# Altium PCB Splitter_aile_V1_PCB.PcbDoc
Units mm, origin at the board's own origin, x right, y up, seen from the top; angles counter-clockwise.
Board outline 35.5 x 41.5 mm, 4 copper layers (Top Layer, Int1 (PWR), Int2 (GND), Bottom Layer), stack 1.439 mm thick; 3 components, 2 nets, 16 pads, 38 vias.
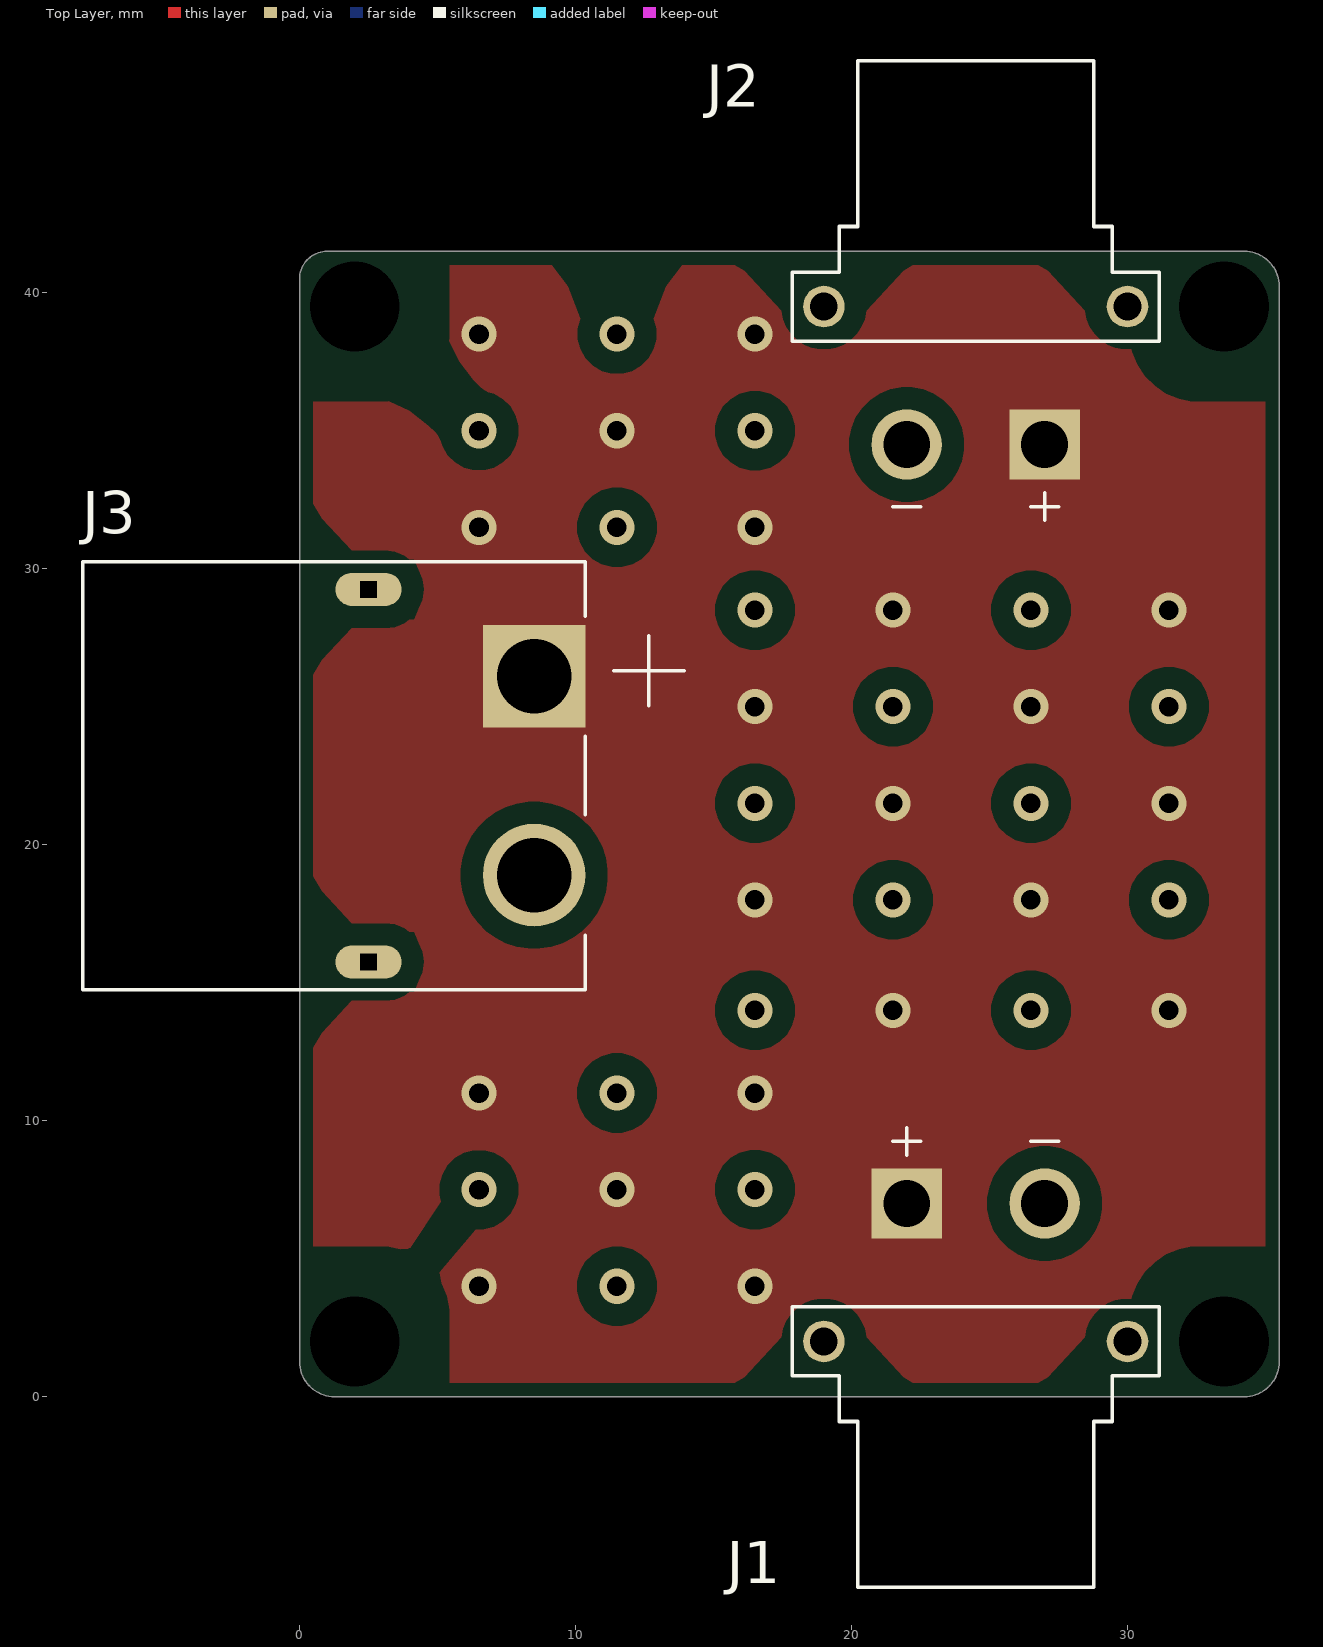
[diagram p0: Top Layer view]
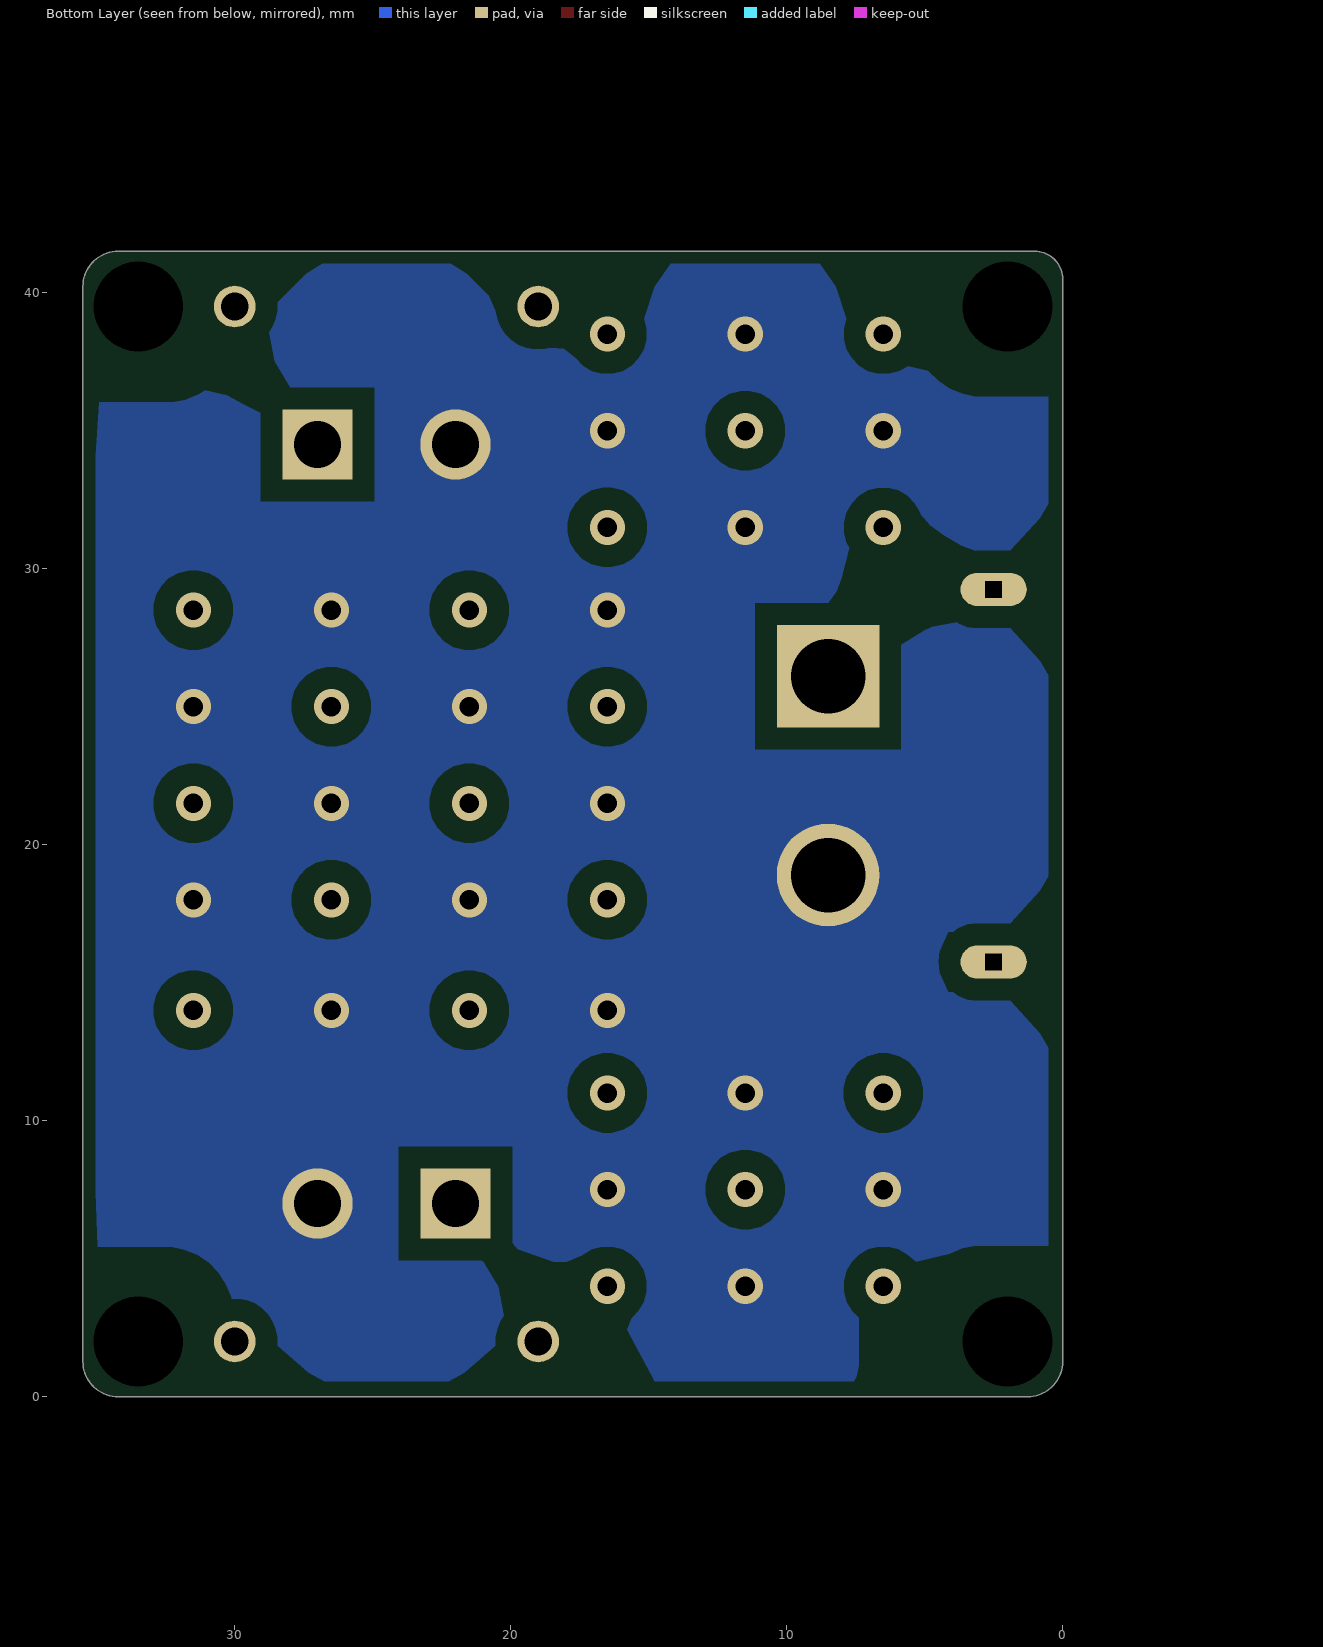
[diagram p1: Bottom Layer view, seen from below]
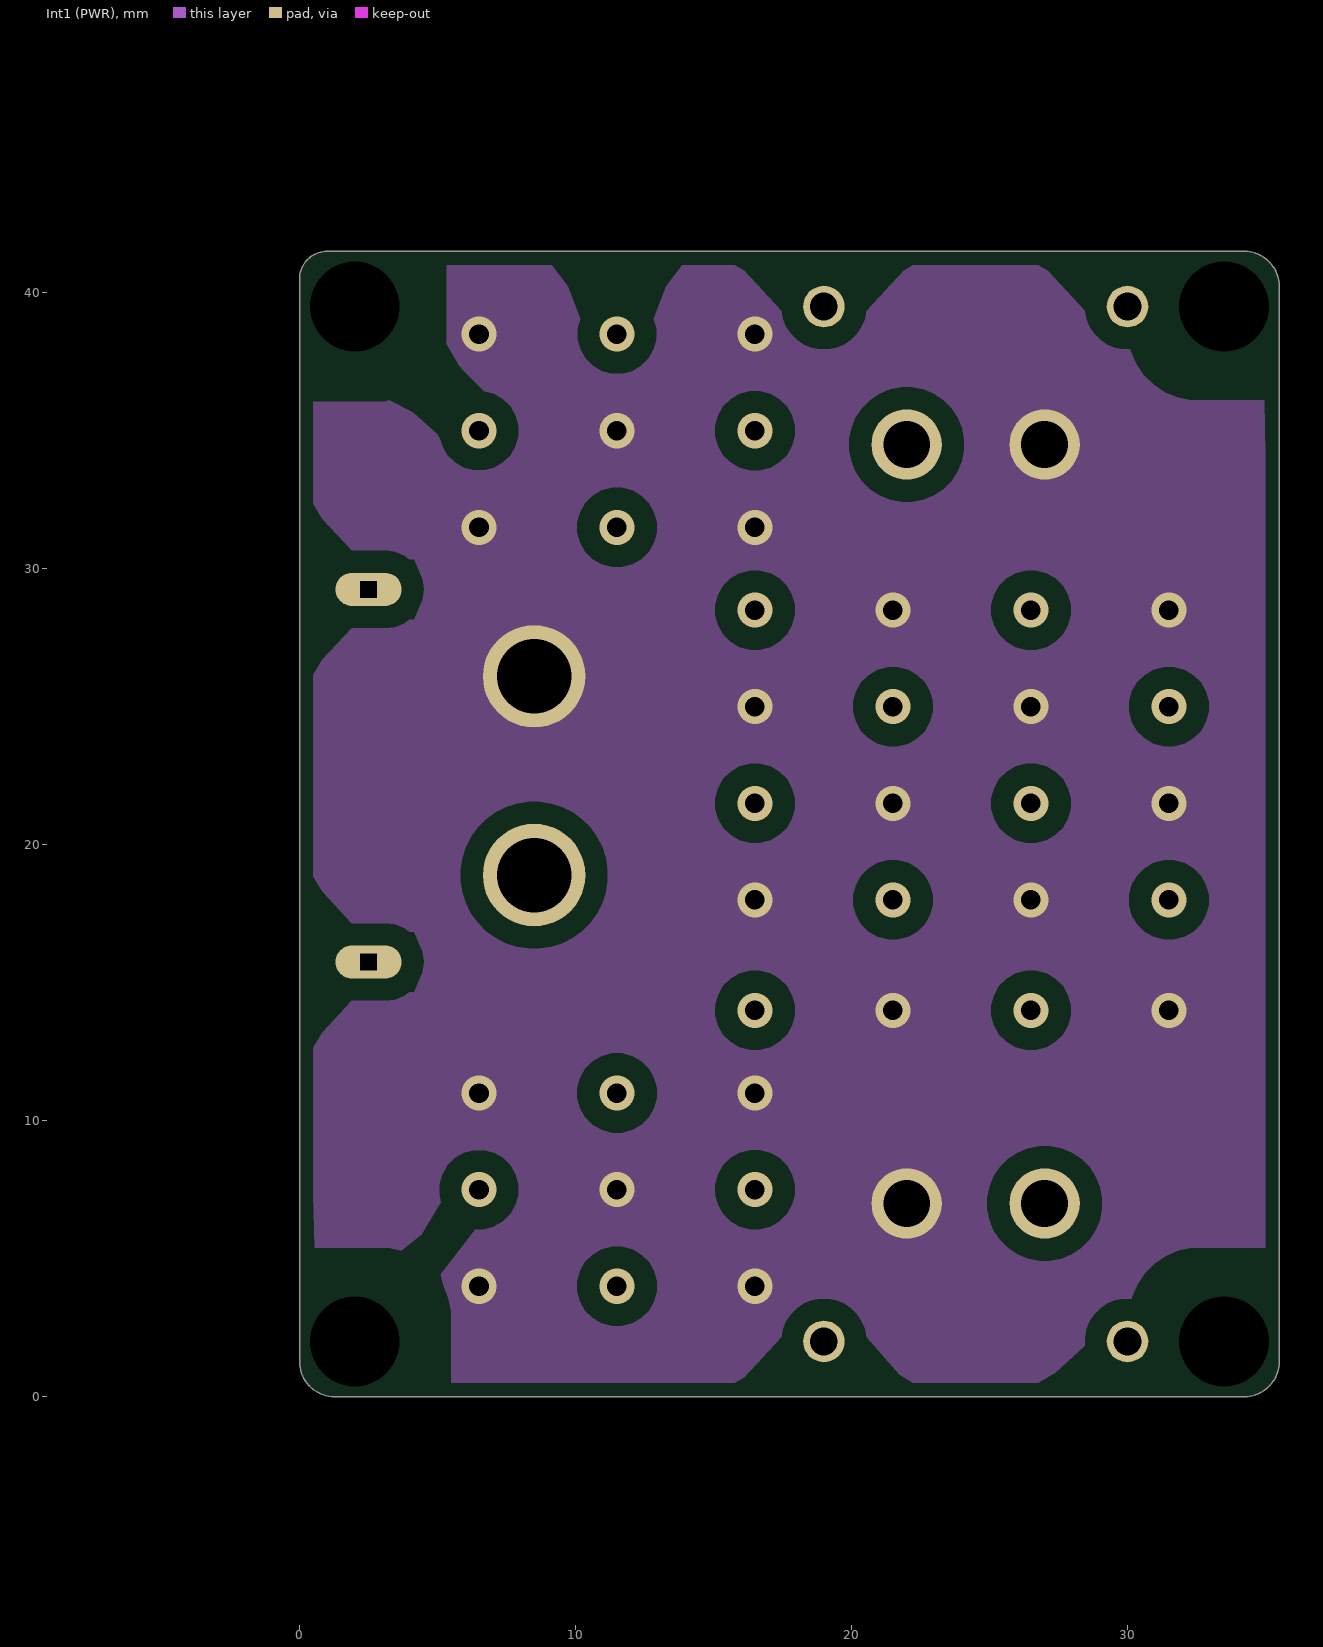
[diagram p2: Int1 (PWR)]
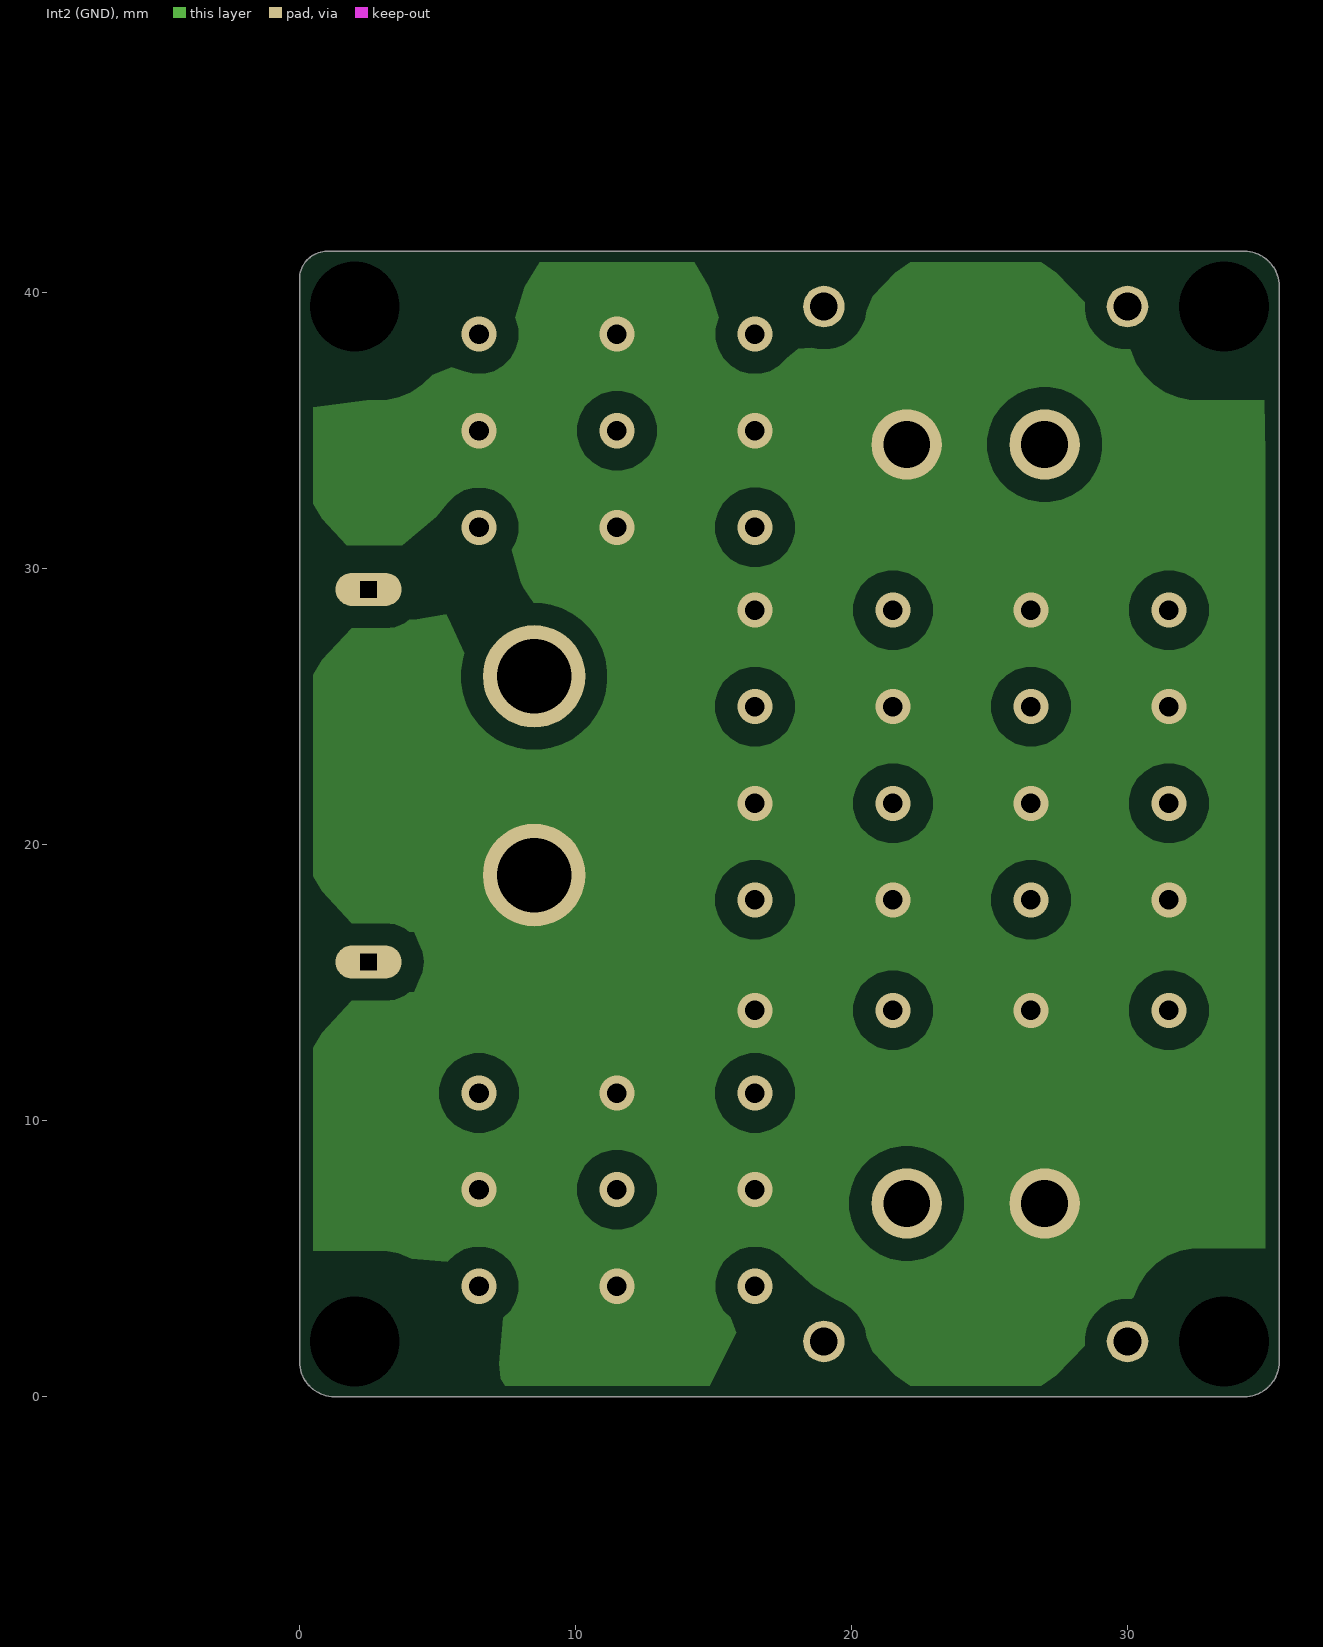
[diagram p3: Int2 (GND)]
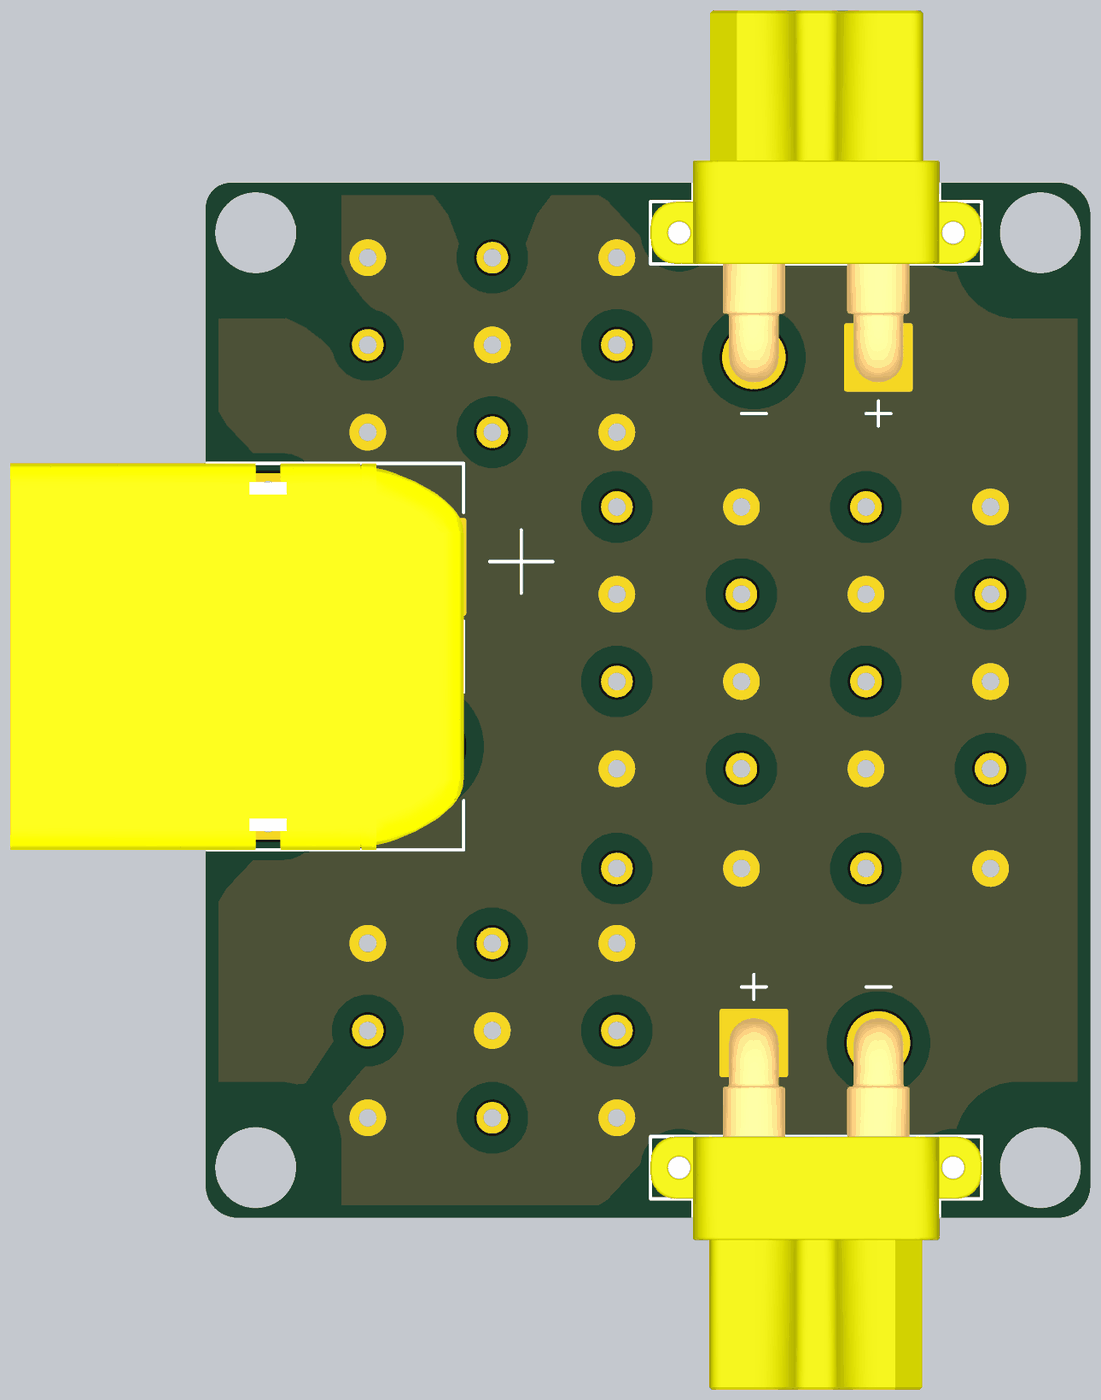
[diagram p4: 3D render of the assembled board from above, using the file's embedded part models]

## Layer stack, top to bottom
Top Solder: solder mask 0.0254, SM-001, Dk 4
Top Layer: signal copper 0.07
Dielectric 1: prepreg 0.1295, PP-017, Dk 4.3
Dielectric 2: prepreg 0.1295, PP-017, Dk 4.3
Int1 (PWR): signal copper 0.035
Dielectric 3: core 0.7112, Core-039, Dk 4.8
Int2 (GND): signal copper 0.035
Dielectric 4: prepreg 0.1295, PP-017, Dk 4.3
Dielectric 5: prepreg 0.1295, PP-017, Dk 4.3
Bottom Layer: signal copper 0.07
Bottom Solder: solder mask 0.0254, SM-001, Dk 4

## Board outline
0,1.27 0,40.5 cw(c1,40.5) 1,41.5 34.23,41.5 cw(c34.23,40.23) 35.5,40.23 35.5,1.27 cw(c34.23,1.27) 34.23,0 1.27,0 cw(c1.27,1.27)

## Design rules (kind name [scope] priority, off if disabled: settings)
Clearance [All] p1: gap=0.8 ignorepadtopadclearanceinfootprint=FALSE
PlaneClearance [All] p1: clearance=3
PolygonConnect [All] p1: connectstyle=Direct reliefconductorwidth=0.5 reliefentries=4 polygonreliefangle="90 Angle" airgapwidth=0.254
RoutingVias [All] p1: holewidth=0.711 width=1.27 viastyle="Through Hole" minholewidth=0.711 minwidth=1.27 maxholewidth=0.711 maxwidth=1.27
SolderMaskExpansion [All] p1: expansion=0.102 istentingtop=FALSE
SupplyNets "Schematic Supply Nets" [InNet('GND')] p1: voltage=0.000
Width [All] p1: maxlimit=8.5 minlimit=2 preferedwidth=3
29 further rules are at their usual default settings.

## Components (designator, comment, footprint, x,y, rotation, side; value= is the part's Value field where it differs from the comment)
J1 "XT30PW-F" AMASS_XT30PW-F 24.5,2 r180 top
J2 "XT30PW-F" AMASS_XT30PW-F 24.5,39.5 r0 top
J3 "XT60PW-M" AMASS_XT60PW-M 2.5,22.5 r90 top

## Footprints (in the part's own frame and the unit in brackets; to place one, negate y for a bottom-side part, rotate by r counter-clockwise, add the part's x,y. Pads: shape width x height; smd on the part's side, far side on the other; paste and mask are expansions set on the pad)
AMASS_XT30PW-F [mm]
  round 2.55 hole 1.7: N(-2.5,-5)
  rect 2.55x2.55 / inner round 2.55 / far side rect 2.55x2.55 hole 1.7: P(2.5,-5)
  round 1.508 hole 1: S1(5.5,0) S2(-5.5,0)
  silkscreen extent -6.65,-7.75 6.65,8.9, body extent -6.65,-6 6.65,8.9, height 5
AMASS_XT60PW-M [mm]
  rect 3.716x3.716 / inner round 3.716 / far side rect 3.716x3.716 hole 2.7: 1(3.6,-6)
  round 3.716 hole 2.7: 2(-3.6,-6)
  oval 1.2x2.4 hole 0.6 square: S1(6.75,0) S2(-6.75,0)
  silkscreen extent -7.75,-11.43 7.75,10.35, body extent -7.75,-7.85 7.75,10.35, height 8.4

## Part data
J1 J2: "Socket; DC supply; XT30; female; PIN: 2; on PCBs; THT; yellow; 15A", Package=None, Check_prices=https://www.snapeda.com/parts/XT30PW-F/AMASS/view-part/?ref=eda, MF=amass, MP=XT30PW-F, SnapEDA_Link=https://www.snapeda.com/parts/XT30PW-F/AMASS/view-part/?ref=snap
J3: "Socket, DC supply, male, PIN: 2", Package=Package, Availability="Not in stock", Check_prices=https://www.snapeda.com/parts/XT60PW-M/AMASS/view-part/?ref=eda, MF=AMASS, MP=XT60PW-M, Price=None, SnapEDA_Link=https://www.snapeda.com/parts/XT60PW-M/AMASS/view-part/?ref=snap

## Free pads (board coordinates)
  round 1.524 hole 3.25 unplated: 1(2,2) 1(2,39.5) 1(33.5,2) 1(33.5,39.5)

## Via types
v1: diameter 1.27, hole 0.711, Top Layer to Bottom Layer, 38 vias

## Nets (pads, with @x,y where several pads share a name; then routed paths per layer and width w, separated by ;. In a path a pad name is that pad's centre, name@x,y a point inside that pad or via, vN(x,y) a via of type N, cw(c..) or ccw(c..) an arc to the next point about the centre after c; other vN are vias at no path point)
GND: J1.N J2.N J3.2
  other v1: 11.5,4 6.5,7.5 16.5,7.5 11.5,11 16.5,14 26.5,14 21.5,18 31.5,18 16.5,21.5 26.5,21.5 21.5,25 31.5,25 16.5,28.5 26.5,28.5 11.5,31.5 6.5,35 16.5,35 11.5,38.5
NetJ1_P: J1.P J2.P J3.1
  other v1: 6.5,4 16.5,4 11.5,7.5 6.5,11 16.5,11 21.5,14 31.5,14 16.5,18 26.5,18 21.5,21.5 31.5,21.5 16.5,25 26.5,25 21.5,28.5 31.5,28.5 6.5,31.5 16.5,31.5 11.5,35 6.5,38.5 16.5,38.5
pads on no net: J1.S1 J1.S2 J2.S1 J2.S2 J3.S1 J3.S2

## Polygon pours and split planes (outlines as drawn)
NetJ1_P on Top Layer "NETJ1_P_L01_P013" (solid, pour order 13): 0.5,40.5 cw(c1,40.5) 1,41 34.5,41 cw(c34.5,40.5) 35,40.5 35,1 cw(c34.5,1) 34.5,0.5 1,0.5 cw(c1,1) 0.5,1 0.5,37.5
NetJ1_P on Int1 (PWR) "NETJ1_P_L02_P016" (solid, pour order 16): 0.5,39.793 cw(c2.207,39.793) 1,41 33.793,41 cw(c33.793,39.293) 35,40.5 35,1.707 cw(c33.293,1.707) 34.5,0.5 1,0.5 cw(c2.207,1.707) 0.5,1.707 0.5,35.5
GND on Bottom Layer "GND_L04_P000" (solid, pour order 0): 0.529,40.558 cw(c1.029,40.558) 1.029,41.058 34.529,41.058 cw(c34.529,40.558) 35.029,40.558 35.029,1.058 cw(c34.529,1.058) 34.529,0.558 1.029,0.558 cw(c1.029,1.058) 0.529,1.058
GND on Int2 (GND) "GND_L03_P020" (solid, pour order 20): 0.4,40.034 cw(c1.766,40.034) 0.8,41 cw(c1.041,40.759) 1.041,41.1 34.276,41.1 cw(c34.276,40.076) 35,40.8 35,1.466 cw(c33.634,1.466) 34.6,0.5 cw(c34.359,0.741) 34.359,0.4 2.19,0.4 cw(c2.19,2.79) 0.5,1.1 0.5,35.859 ccw(c0.159,35.859) 0.4,36.1

## Other copper
Top Layer:
  pour cut-out: 35,5.442 32.598,5.442 ccw(c32.598,2.902) 30.058,2.902 30.058,0.5 32.3,0.5 35,4
  pour cut-out: 5.442,0.5 5.442,2.902 ccw(c2.902,2.902) 2.902,5.442 0.5,5.442 0.5,3.2 4,0.5
  pour cut-out: 30.058,41 30.058,38.598 ccw(c32.598,38.598) 32.598,36.058 35,36.058 35,38.3 31.5,41
  pour cut-out: 0.5,36.058 2.902,36.058 ccw(c2.902,38.598) 5.442,38.598 5.442,41 3.2,41 0.5,37.5
Int1 (PWR):
  pour cut-out: 35.002,5.4 32.6,5.4 ccw(c32.6,2.86) 30.06,2.86 30.06,0.458 32.302,0.458 35.002,3.958
  pour cut-out: 5.492,0.45 5.492,2.852 ccw(c2.952,2.852) 2.952,5.392 0.55,5.392 0.55,3.15 4.05,0.45
  pour cut-out: 30.008,41.05 30.008,38.648 ccw(c32.548,38.648) 32.548,36.108 34.95,36.108 34.95,38.35 31.45,41.05
  pour cut-out: 0.4,36.058 2.802,36.058 ccw(c2.802,38.598) 5.342,38.598 5.342,41 3.1,41 0.4,37.5
Int2 (GND):
  pour cut-out: 30.014,41.053 30.014,38.651 ccw(c32.554,38.651) 32.554,36.111 34.956,36.111 34.956,38.353 31.456,41.053
  pour cut-out: 35.053,5.386 32.651,5.386 ccw(c32.651,2.846) 30.111,2.846 30.111,0.444 32.353,0.444 35.053,3.944
  pour cut-out: 5.392,0.35 5.392,2.752 ccw(c2.852,2.752) 2.852,5.292 0.45,5.292 0.45,3.05 3.95,0.35
  pour cut-out: 0.45,36.108 2.852,36.108 ccw(c2.852,38.648) 5.392,38.648 5.392,41.05 3.15,41.05 0.45,37.55
Bottom Layer:
  pour cut-out: 34.969,5.43 32.567,5.43 ccw(c32.567,2.89) 30.027,2.89 30.027,0.488 32.269,0.488 34.969,3.988
  pour cut-out: 5.43,0.531 5.43,2.933 ccw(c2.89,2.933) 2.89,5.473 0.488,5.473 0.488,3.231 3.988,0.531
  pour cut-out: 0.486,36.24 2.888,36.24 ccw(c2.888,38.78) 5.428,38.78 5.428,41.181 3.186,41.181 0.486,37.681
  pour cut-out: 29.97,40.969 29.97,38.567 ccw(c32.51,38.567) 32.51,36.027 34.912,36.027 34.912,38.269 31.412,40.969

## Silkscreen, mask and mechanical layers (free items; w line width, h text height)
Mechanical 1:
  lines w0.254: 0,1.27 ccw(c1.27,1.27) 1.27,0 1.5,0 29,0 34.23,0 ccw(c34.23,1.27) 35.5,1.27 35.5,36.73 35.5,40.23 ccw(c34.23,40.23) 34.23,41.5 28,41.5 2.5,41.5 1,41.5 ccw(c1,40.5) 0,40.5 0,37 0,35.23 0,16.5 0,1.27